# Altium PCB MAGI'sBatteryPowerMega.PcbDoc (part 2 of 2)
Units mil, origin at the board's own origin, x right, y up, seen from the top; angles counter-clockwise.
Board outline 6000 x 4000 mil, 2 copper layers (Top Layer, Bottom Layer); 34 components, 41 nets, 189 pads, 153 vias.
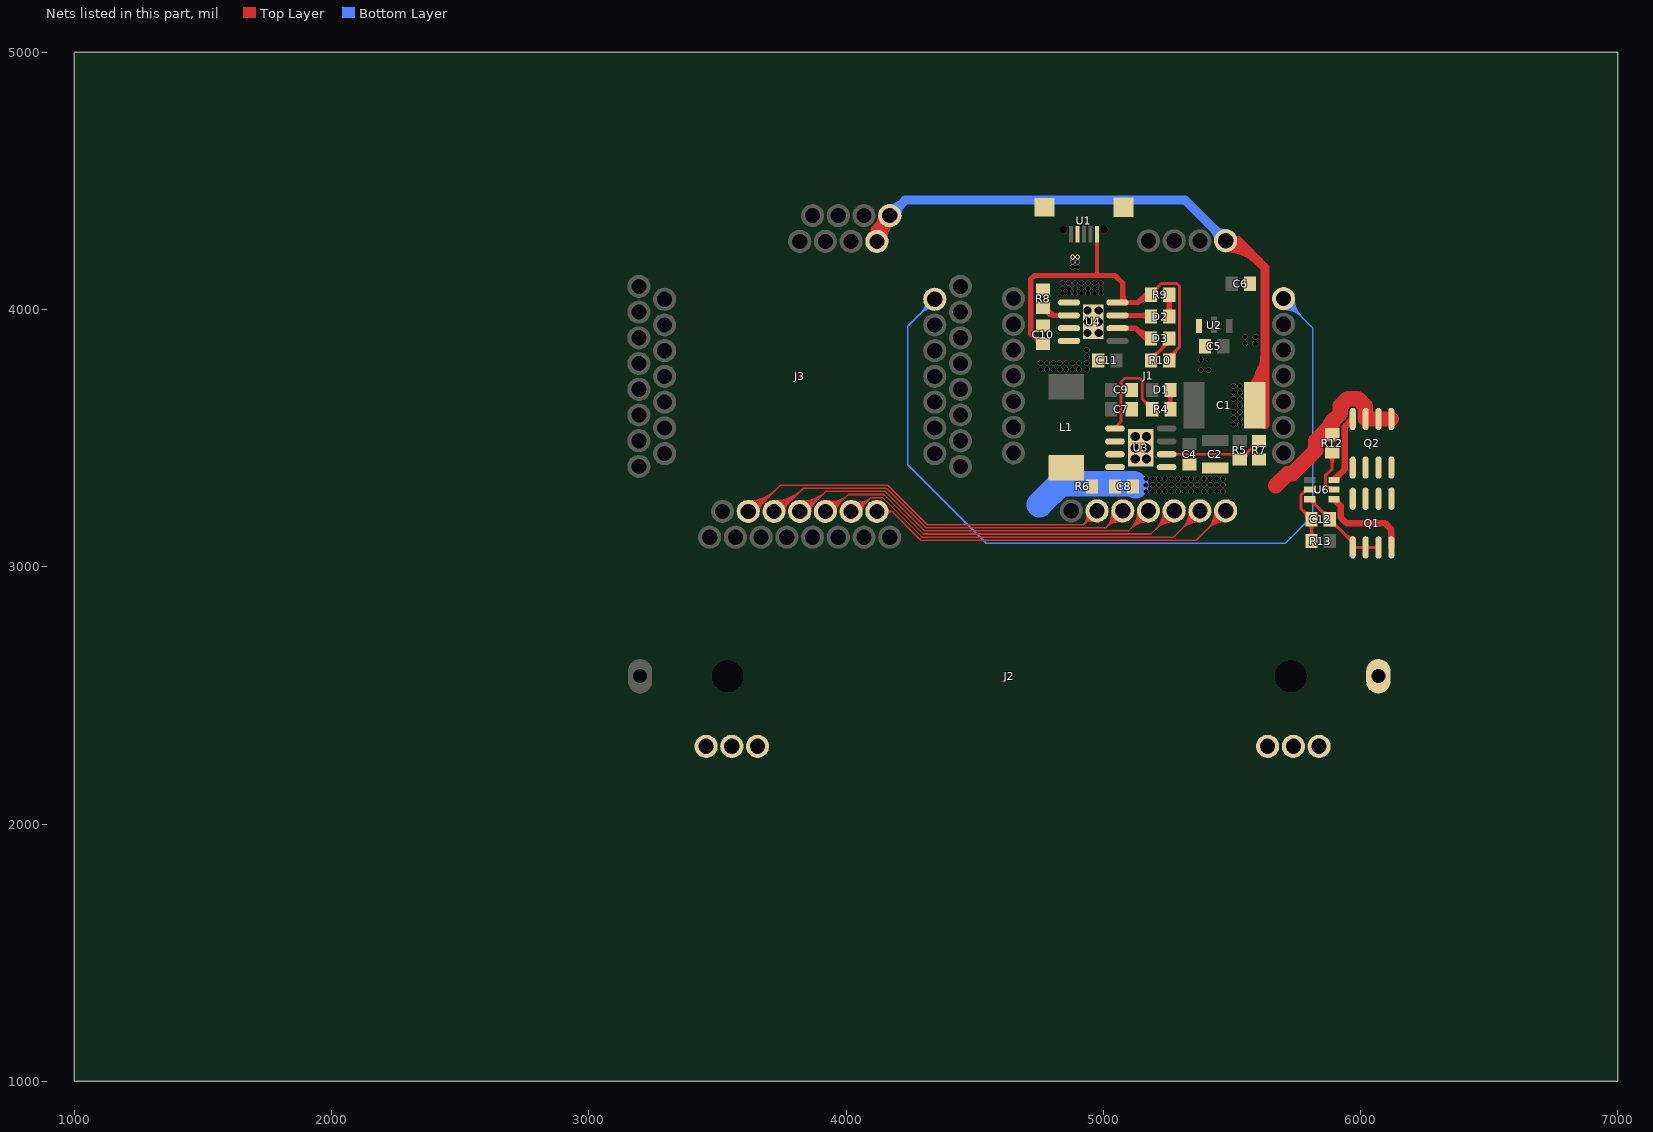
[diagram p2: the nets of this part, all layers, seen from the top]

## Via types
v1: diameter 19.68, hole 19.68, Top Layer to Bottom Layer, 125 vias
v2: diameter 19.68, hole 11.81, Top Layer to Bottom Layer, 11 vias
v3: diameter 35.43, hole 31.5, Top Layer to Bottom Layer, 6 vias
v4: diameter 35.43, hole 35.43, Top Layer to Bottom Layer, 6 vias
v5: diameter 19.68, hole 15.75, Top Layer to Bottom Layer, 5 vias

## Nets (pads, with @x,y where several pads share a name; then routed paths per layer and width w, separated by ;. In a path a pad name is that pad's centre, name@x,y a point inside that pad or via, vN(x,y) a via of type N, cw(c..) or ccw(c..) an arc to the next point about the centre after c; other vN are vias at no path point) (continued)
D8: J1.16 J3.16 | length 2425.1
  Top Layer w6: J3.16@3620,3215 3643.63,3215 3745.63,3317 4162.25,3317 4315.81,3163.44 4921.94,3163.44 ; J3.16@3620,3221 ccw(c3620,3292.54) 3670.59,3241.95 ; J3.16@3620,3227 ccw(c3620,3313.02) 3680.83,3252.2 ; J3.16@3620,3233 ccw(c3620,3333.51) 3691.07,3262.44 ; J3.16@3620,3239 ccw(c3620,3353.99) 3701.31,3272.68 ; J3.16@3620,3245 ccw(c3620,3374.48) 3711.56,3282.92 ; J3.16@3620,3251 ccw(c3620,3394.97) 3721.8,3293.17 ; J3.16@3620,3257 ccw(c3620,3415.45) 3732.04,3303.41 ; J3.16@3656,3215 cw(c3685.86,3215) 3664.75,3236.11 ; J3.16@3662,3215 cw(c3706.34,3215) 3674.99,3246.36 ; J1.16@4934.96,3208.26 cw(c4887.71,3197.68) 4921.95,3163.44 ; 4937.37,3178.87 cw(c4961.83,3154.41) J1.16@4969.39,3188.17 ; 4937.38,3178.87 ccw(c4912.92,3203.33) J1.16@4946.67,3210.89 ; J1.16@4940.81,3209.58 cw(c4900.31,3200.51) 4929.66,3171.16 cw(c4959.01,3141.81) J1.16@4968.08,3182.31 ; J1.16@4966.77,3176.46 ccw(c4956.19,3129.2) 4921.95,3163.44 ; J1.16@4975.94,3217.44 4921.94,3163.44
D9: J1.17 J3.17 | length 2614.3
  Top Layer w6: J3.17@3720,3215 3743.63,3215 3833.63,3305 4157.28,3305 4310.84,3151.44 5009.94,3151.44 ; J3.17@3720,3221 ccw(c3720,3292.54) 3770.59,3241.95 ; J3.17@3720,3227 ccw(c3720,3313.02) 3780.83,3252.2 ; J3.17@3720,3233 ccw(c3720,3333.51) 3791.07,3262.44 ; J3.17@3720,3239 ccw(c3720,3353.99) 3801.31,3272.68 ; J3.17@3720,3245 ccw(c3720,3374.48) 3811.56,3282.92 ; J3.17@3720,3251 ccw(c3720,3394.97) 3821.8,3293.17 ; J3.17@3720,3257 ccw(c3720,3415.45) 3832.04,3303.41 ; J3.17@3756,3215 cw(c3785.86,3215) 3764.75,3236.11 ; J3.17@3762,3215 cw(c3806.34,3215) 3774.99,3246.36 ; J1.17@5034.02,3214.91 cw(c4951.47,3209.93) 5009.95,3151.44 ; J1.17@5040.01,3215.27 cw(c4969.25,3211) 5019.38,3160.87 cw(c5069.5,3110.74) J1.17@5073.78,3181.51 ; J1.17@5046,3215.63 cw(c4987.03,3212.07) 5028.8,3170.3 cw(c5070.58,3128.53) J1.17@5074.14,3187.5 ; J1.17@5051.99,3215.99 cw(c5004.81,3213.15) 5038.23,3179.73 cw(c5071.65,3146.31) J1.17@5074.5,3193.48 ; J1.17@5073.41,3175.52 ccw(c5068.43,3092.96) 5009.95,3151.44 ; J1.17@5075.94,3217.44 5009.94,3151.44
D10: J1.18 J3.18 | length 2598.4
  Top Layer w6: J3.18@3820,3215 3843.63,3215 3921.63,3293 ; J3.18@3820.48,3220.98 ccw(c3825.19,3279.29) 3866.56,3237.92 ; J3.18@3820.97,3226.96 ccw(c3826.56,3296.28) 3875.74,3247.1 ; J3.18@3821.45,3232.94 ccw(c3827.94,3313.26) 3884.91,3256.28 ; J3.18@3821.93,3238.92 ccw(c3829.31,3330.25) 3894.09,3265.46 ; J3.18@3822.41,3244.9 ccw(c3830.68,3347.23) 3903.27,3274.64 ; J3.18@3822.9,3250.88 ccw(c3832.05,3364.22) 3912.45,3283.82 ; J3.18@3823.38,3256.86 ccw(c3833.42,3381.2) 3921.63,3292.99 ; J3.18@3856,3215 cw(c3885.86,3215) 3864.75,3236.11 ; J3.18@3862,3215 cw(c3906.34,3215) 3874.99,3246.36 ; J1.18@5133.94,3217.44 cw(c5032.55,3217.44) 5104.25,3145.74 cw(c5175.94,3074.04) J1.18@5175.94,3175.44 ; J1.18@5139.94,3217.44 cw(c5053.03,3217.44) 5114.49,3155.99 cw(c5175.94,3094.53) J1.18@5175.94,3181.44 ; J1.18@5145.94,3217.44 cw(c5073.52,3217.44) 5124.73,3166.23 cw(c5175.94,3115.01) J1.18@5175.94,3187.44 ; J1.18@5151.94,3217.44 cw(c5094,3217.44) 5134.97,3176.47 cw(c5175.94,3135.5) J1.18@5175.94,3193.44 ; J1.18@5175.94,3217.44 5097.94,3139.44 4305.87,3139.44 4152.31,3293 3921.63,3293
D11: J1.19 J3.19 | length 2508.7
  Top Layer w6: J3.19@3920,3215 3943.63,3215 4009.63,3281 ; J3.19@3921.16,3220.89 ccw(c3929.92,3265.28) 3961.92,3233.28 ; J3.19@3922.32,3226.77 ccw(c3932.54,3278.56) 3969.87,3241.24 ; J3.19@3923.48,3232.66 ccw(c3935.16,3291.84) 3977.82,3249.19 ; J3.19@3924.65,3238.55 ccw(c3937.78,3305.13) 3985.77,3257.14 ; J3.19@3925.81,3244.43 ccw(c3940.4,3318.41) 3993.72,3265.09 ; J3.19@3926.97,3250.32 ccw(c3943.03,3331.69) 4001.68,3273.04 ; J3.19@3928.13,3256.21 ccw(c3945.65,3344.98) 4009.63,3281 ; J3.19@3956,3215 cw(c3985.86,3215) 3964.75,3236.11 ; J3.19@3962,3215 cw(c4006.34,3215) 3974.99,3246.36 ; J1.19@5233.94,3217.44 cw(c5132.55,3217.44) 5204.25,3145.74 cw(c5275.94,3074.04) J1.19@5275.94,3175.44 ; J1.19@5239.94,3217.44 cw(c5153.03,3217.44) 5214.49,3155.99 cw(c5275.94,3094.53) J1.19@5275.94,3181.44 ; J1.19@5245.94,3217.44 cw(c5173.52,3217.44) 5224.73,3166.23 cw(c5275.94,3115.01) J1.19@5275.94,3187.44 ; J1.19@5251.94,3217.44 cw(c5194,3217.44) 5234.97,3176.47 cw(c5275.94,3135.5) J1.19@5275.94,3193.44 ; J1.19@5275.94,3217.44 5185.94,3127.44 4300.9,3127.44 4147.34,3281 4009.63,3281
D12: J1.20 J3.20 | length 2379.2
  Top Layer w6: J3.20@4020,3215 4043.63,3215 4097.63,3269 ; J3.20@4024,3226.31 ccw(c4036.82,3262.54) 4064,3235.37 ; J3.20@4026,3231.97 ccw(c4040.34,3272.48) 4070.73,3242.09 ; J3.20@4028.01,3237.63 ccw(c4043.86,3282.42) 4077.45,3248.82 ; J3.20@4030.01,3243.28 ccw(c4047.37,3292.35) 4084.18,3255.55 ; J3.20@4032.01,3248.94 ccw(c4050.89,3302.29) 4090.9,3262.27 ; J3.20@4034.01,3254.59 ccw(c4054.4,3312.22) 4097.63,3269 ; J3.20@4056,3215 cw(c4085.86,3215) 4064.75,3236.11 ; J3.20@4062,3215 cw(c4106.34,3215) 4074.99,3246.36 ; J1.20@5333.94,3217.44 cw(c5232.55,3217.44) 5304.25,3145.74 cw(c5375.94,3074.04) J1.20@5375.94,3175.44 ; J1.20@5339.94,3217.44 cw(c5253.03,3217.44) 5314.49,3155.99 cw(c5375.94,3094.53) J1.20@5375.94,3181.44 ; J1.20@5345.94,3217.44 cw(c5273.52,3217.44) 5324.73,3166.23 cw(c5375.94,3115.01) J1.20@5375.94,3187.44 ; J1.20@5351.94,3217.44 cw(c5294,3217.44) 5334.97,3176.47 cw(c5375.94,3135.5) J1.20@5375.94,3193.44 ; J1.20@5375.94,3217.44 5273.94,3115.44 4295.93,3115.44 4142.37,3269 4097.63,3269
D13: J1.21 J3.21 | length 2046
  Top Layer w6: J3.21@4120,3215 4179.4,3215 ; J3.21@4153.94,3203 cw(c4170.91,3197) 4170.91,3215 cw(c4170.91,3233) J3.21@4153.94,3227 ; J3.21@4159.6,3201 cw(c4179.39,3194) 4179.39,3215 ; J3.21@4159.6,3229 ccw(c4179.39,3236) 4179.39,3215 ; J1.21@5433.94,3217.44 cw(c5332.55,3217.44) 5404.25,3145.74 cw(c5475.94,3074.04) J1.21@5475.94,3175.44 ; J1.21@5439.94,3217.44 cw(c5353.03,3217.44) 5414.49,3155.99 cw(c5475.94,3094.53) J1.21@5475.94,3181.44 ; J1.21@5445.94,3217.44 cw(c5373.52,3217.44) 5424.73,3166.23 cw(c5475.94,3115.01) J1.21@5475.94,3187.44 ; J1.21@5451.94,3217.44 cw(c5394,3217.44) 5434.97,3176.47 cw(c5475.94,3135.5) J1.21@5475.94,3193.44 ; J1.21@5475.94,3217.44 5361.94,3103.44 4290.96,3103.44 4179.4,3215
GND: C1.2 C2.2 C4.2 C5.2 C6.2 C7.2 C8.2 C9.2 C10.2 C11.2 J1.1 J3.1 pad.1 pad.2 pad.3 pad.4 Q2.1 Q2.2 Q2.3 R7.2 R8.1 R12.1 U1.4 U1.6 U1.7 U2.1 U3.5 U3.9 U4.1 U4.3 U4.9 | length 5039
  Top Layer w35: J1.1@5475.94,4239.94 cw(c5475.94,4057.59) 5604.89,4186.53 ; J1.1@5475.94,4267.44 5523.98,4267.44 ; J1.1@5475.94,4274.94 cw(c5475.94,4177.09) 5545.14,4246.28 ; C1.2@5610.86,3686.29 cw(c5693.57,3722.86) 5615.25,3768.08 ; C1.2@5628.44,3552.44 5628.44,4162.97 5523.98,4267.44 ; 5523.98,4267.44 ccw(c5523.98,4239.25) 5499.66,4253.52 cw(c5523.98,4239.25) 5523.98,4267.44 ; 5523.98,4267.44 cw(c5523.98,4295.64) 5499.66,4281.36 ccw(c5523.98,4295.64) 5523.98,4267.44 ; C1.2@5572.2,3693.51 ccw(c5436.41,3829.3) 5628.44,3829.3 cw(c5436.41,3829.3) C1.2@5572.2,3693.51 ; C1.2@5596.95,3668.76 ccw(c5520.91,3744.8) 5628.44,3744.8 cw(c5520.91,3744.8) C1.2@5596.95,3668.76 ; C1.2@5621.7,3644.01 ccw(c5605.4,3660.31) 5628.44,3660.31 cw(c5605.4,3660.31) C1.2@5621.7,3644.01
  Top Layer w50: J3.1@4120,4265 4120,4307.52 J3.1@4170,4357.52 ; 4130.57,4318.09 ccw(c4083.66,4365) J3.1@4150,4365 ; J3.1@4139.81,4267.73 cw(c4245.27,4282.25) J3.1@4170,4357.52 ; 4144.58,4313.5 ccw(c4091.71,4344.02) J3.1@4150.68,4359.82 ; J3.1@4170,4365 J3.1@4170,4357.52
  Top Layer w60: 5670,3315 5716.44,3361.44 5734.5,3361.44 5826.44,3453.39 5826.44,3483.1 ; 5837.85,3501.84 cw(c5886.06,3453.63) 5886.06,3521.81 ccw(c5886.06,3471.33) 5850.36,3507.02 ; R12.1@5884.47,3512.25 cw(c5914.48,3529.51) 5890,3553.99 ; R12.1@5889.31,3511.04 cw(c5916.71,3537.05) 5890,3563.77 ; R12.1@5890,3515.43 5858.77,3515.43 5826.44,3483.1 ; Q2.1@6120,3574.49 Q2.2@6070,3574.49 Q2.3@6020,3574.49 6017.81,3576.68 6017.81,3625.79 5989.8,3653.8 5950.2,3653.8 5922.19,3625.79 5922.19,3595.96 5890,3563.77 ; 5826.44,3483.1 5826.44,3490.43 5890,3553.99 ; 5890,3553.99 5890,3563.77
  Bottom Layer w35: J3.1@4170,4365 4230,4425 5318.39,4425 J1.1@5475.94,4267.44 ; J3.1@4170,4392.5 ccw(c4170,4458.89) 4216.95,4411.95 ccw(c4263.89,4365) J3.1@4197.5,4365 ; J1.1@5448.44,4267.44 ccw(c5382.05,4267.44) 5429,4314.39 ccw(c5475.94,4361.33) J1.1@5475.94,4294.94
  Bottom Layer w100: 4752.45,3242.44 4832.45,3322.44 5119.44,3322.44 5125.94,3315.93
  other v1: 5165.94,3292.44 5190.94,3292.44 5215.94,3292.44 5240.94,3292.44 5265.94,3292.44 5290.94,3292.44 5315.94,3292.44 5340.94,3292.44 5365.94,3292.44 5390.94,3292.44 5415.94,3292.44 5440.94,3292.44 5465.94,3292.44 5165.94,3317.44 5190.94,3317.44 5215.94,3317.44 5240.94,3317.44 5265.94,3317.44 5290.94,3317.44 5315.94,3317.44 5340.94,3317.44 5365.94,3317.44 5390.94,3317.44 5415.94,3317.44 5440.94,3317.44 5465.94,3317.44 5165.94,3342.44 5190.94,3342.44 5215.94,3342.44 5240.94,3342.44 5265.94,3342.44 5290.94,3342.44 5315.94,3342.44 5340.94,3342.44 5365.94,3342.44 5390.94,3342.44 5415.94,3342.44 5440.94,3342.44 5465.94,3342.44 5505.94,3552.44 5530.94,3552.44 5505.94,3577.44 5530.94,3577.44 5505.94,3602.44 5530.94,3602.44 5505.94,3627.44 5530.94,3627.44 5505.94,3652.44 5530.94,3652.44 5505.94,3677.44 5530.94,3677.44 5505.94,3702.44 5530.94,3702.44 5380,3765 5410,3765 4755.94,3767.44 4780.94,3767.44 4805.94,3767.44 4830.94,3767.44 4855.94,3767.44 4880.94,3767.44 4905.94,3767.44 4935.94,3767.44 4755.94,3792.44 4780.94,3792.44 4805.94,3792.44 4830.94,3792.44 4855.94,3792.44 4880.94,3792.44 4905.94,3792.44 4935.94,3792.44 5380,3805 5410,3805 4935.94,3817.44 4935.94,3842.44 5550.94,3867.44 5590.94,3867.44 5550.94,3892.44 5590.94,3892.44 4840.94,4062.44 4865.94,4062.44 4890.94,4062.44 4915.94,4062.44 4940.94,4062.44 4965.94,4062.44 4990.94,4062.44 4840.94,4082.44 4865.94,4082.44 4890.94,4082.44 4915.94,4082.44 4940.94,4082.44 4965.94,4082.44 4990.94,4082.44 4840.94,4102.44 4865.94,4102.44 4890.94,4102.44 4915.94,4102.44 4940.94,4102.44 4965.94,4102.44 4990.94,4102.44 4880,4165 4900,4165
  other v2: 4880,4205 4900,4205
  other v3: 4939.29,3909.13 4982.6,3909.13 4939.29,3952.44 4982.6,3952.44 4939.29,3995.75 4982.6,3995.75
  other v4: 5124.29,3419.13 5167.6,3419.13 5124.29,3462.44 5167.6,3462.44 5124.29,3505.75 5167.6,3505.75
  other v5: 4880,4185 4900,4185
NetC3_2: R5.2 R7.1 U3.6 | length 843
  Top Layer w10: U3.6@5246.34,3437.44 5510.51,3437.44 R5.2@5530.94,3417.01 5532.47,3417.01 5603.34,3487.87 R7.1@5605.94,3487.87 ; R5.2@5533.52,3417.22 cw(c5562.45,3412.71) 5554.87,3440.99 ; R5.2@5535.22,3415.67 ccw(c5527.02,3448.36) 5559.57,3439.63 ; 5289.36,3437.44 cw(c5289.36,3453.88) 5277.73,3442.26 ccw(c5289.36,3453.88) 5289.36,3437.44 ; 5289.36,3437.44 ccw(c5289.36,3421) 5277.73,3432.62 cw(c5289.36,3421) 5289.36,3437.44 ; R5.2@5534.88,3435.63 ccw(c5534.88,3474.77) 5562.56,3447.09 cw(c5534.88,3474.77) R5.2@5534.88,3435.63 ; R5.2@5543.5,3417.01 cw(c5570.13,3417.01) 5551.3,3435.84 ccw(c5570.13,3417.01) R5.2@5543.5,3417.01 ; R5.2@5553.5,3417.01 cw(c5604.28,3417.01) 5568.37,3452.91 ccw(c5604.28,3417.01) R5.2@5553.5,3417.01 ; 5569.28,3453.81 ccw(c5535.21,3487.87) 5583.39,3487.87 cw(c5535.21,3487.87) 5569.28,3453.81 ; 5572.49,3457.03 cw(c5602.01,3427.51) 5602.01,3469.25 ccw(c5602.01,3427.51) 5572.49,3457.03
NetC8_1: C8.1 R6.2 U3.3 U3.4
NetC12_1: C12.1 R13.1 U6.5 | length 455.9
  Top Layer w12: 5772.76,3221.8 ccw(c5809.57,3258.61) C12.1@5809.57,3206.56 ; 5777.55,3287.82 cw(c5792.91,3272.46) U6.5@5792.91,3294.19 ; 5782.27,3212.3 cw(c5758.91,3188.94) C12.1@5791.94,3188.94 ; R13.1@5797.11,3116.4 ccw(c5767.02,3146.48) 5809.57,3146.48 ccw(c5852.11,3146.48) R13.1@5822.03,3116.4 ; C12.1@5797.11,3168.6 cw(c5767.02,3138.52) 5809.57,3138.52 cw(c5852.11,3138.52) C12.1@5822.03,3168.6 ; U6.5@5802.76,3300 5789.72,3300 5769.1,3279.38 5769.1,3225.46 C12.1@5809.57,3185 R13.1@5809.57,3100
NetD1_2: D1.2 R4.1 | length 696.3
  Top Layer w10: R4.1@5261.38,3612.44 D1.2@5261.38,3687.44 ; R4.1@5261.38,3638.55 cw(c5306.34,3638.55) 5274.55,3670.34 ccw(c5306.34,3638.55) R4.1@5261.38,3638.55 ; R4.1@5261.38,3638.55 ccw(c5216.42,3638.55) 5248.21,3670.34 cw(c5216.42,3638.55) R4.1@5261.38,3638.55 ; D1.2@5261.38,3661.34 cw(c5216.42,3661.34) 5248.21,3629.55 ccw(c5216.42,3661.34) D1.2@5261.38,3661.34 ; D1.2@5261.38,3661.34 ccw(c5306.34,3661.34) 5274.55,3629.55 cw(c5306.34,3661.34) D1.2@5261.38,3661.34 ; R4.1@5250.71,3631.64 ccw(c5240.21,3646.68) 5257.93,3651.43 cw(c5240.21,3646.68) R4.1@5250.71,3631.64 ; D1.2@5250.71,3668.24 cw(c5240.21,3653.2) 5257.93,3648.46 ccw(c5240.21,3653.2) D1.2@5250.71,3668.24 ; R4.1@5252.07,3632.51 ccw(c5239.38,3654.47) 5263.89,3647.91 cw(c5239.38,3654.47) R4.1@5252.07,3632.51 ; D1.2@5252.07,3667.38 cw(c5239.38,3645.41) 5263.89,3651.97 ccw(c5239.38,3645.41) D1.2@5252.07,3667.38 ; 5258.87,3647.91 ccw(c5283.37,3654.47) 5270.69,3632.51 cw(c5283.37,3654.47) 5258.87,3647.91 ; 5258.87,3651.97 cw(c5283.37,3645.41) 5270.69,3667.38 ccw(c5283.37,3645.41) 5258.87,3651.97 ; 5264.83,3648.46 cw(c5282.54,3653.2) 5272.04,3668.24 ccw(c5282.54,3653.2) 5264.83,3648.46 ; 5264.83,3651.42 ccw(c5282.54,3646.68) 5272.04,3631.64 cw(c5282.54,3646.68) 5264.83,3651.42
NetD2_1: D2.1 R9.1 | length 291.6
  Top Layer w20: D2.1@5256.38,3972.44 R9.1@5256.38,4057.44 ; 5256.38,4009.26 cw(c5223.49,4009.26) 5246.75,3986.01 ccw(c5223.49,4009.26) 5256.38,4009.26 ; 5256.38,4009.26 ccw(c5289.26,4009.26) 5266.01,3986.01 cw(c5289.26,4009.26) 5256.38,4009.26 ; 5256.38,4020.62 cw(c5289.26,4020.62) 5266.01,4043.87 ccw(c5289.26,4020.62) 5256.38,4020.62 ; 5256.38,4020.62 ccw(c5223.49,4020.62) 5246.75,4043.87 cw(c5223.49,4020.62) 5256.38,4020.62
NetD2_2: D2.2 U4.7 | length 235.5
  Top Layer w20: U4.7@5055.43,3977.44 5180.51,3977.44 D2.2@5185.51,3972.44 ; 5150.06,3977.44 cw(c5150.06,3940.92) 5175.88,3966.75 ccw(c5150.06,3940.92) 5150.06,3977.44 ; 5155.19,3977.44 ccw(c5155.19,4006.7) 5175.88,3986.01 cw(c5155.19,4006.7) 5155.19,3977.44
NetD3_1: D3.1 R10.1 | length 430.5
  Top Layer w12: R10.1@5185.51,3802.44 5185.51,3805.38 5256.38,3876.25 D3.1@5256.38,3887.44 ; R10.1@5185.51,3824 ccw(c5185.51,3868.94) 5217.29,3837.16 cw(c5185.51,3868.94) R10.1@5185.51,3824 ; R10.1@5203.13,3806.38 cw(c5243.28,3806.38) 5214.89,3834.76 ccw(c5243.28,3806.38) R10.1@5203.13,3806.38 ; 5221.17,3841.04 ccw(c5178.7,3883.5) 5238.76,3883.5 cw(c5178.7,3883.5) 5221.17,3841.04 ; 5238.68,3858.55 cw(c5256.38,3840.85) 5256.38,3865.88 ccw(c5256.38,3840.85) 5238.68,3858.55 ; D3.1@5241.65,3861.52 ccw(c5219.67,3883.5) 5250.76,3883.5 cw(c5219.67,3883.5) D3.1@5241.65,3861.52
NetD3_2: D3.2 U4.6 | length 338.7
  Top Layer w20: U4.6@5055.43,3927.44 5125.94,3927.44 ; D3.2@5185.51,3887.44 5165.94,3887.44 5125.94,3927.44 ; 5125.95,3927.44 ccw(c5180.46,3981.95) 5184.75,3904.98 cw(c5180.46,3981.95) 5125.95,3927.44 ; 5157.57,3895.82 ccw(c5183.8,3922.05) 5185.87,3885.01 cw(c5183.8,3922.05) 5157.57,3895.82
NetL1_1: L1.1 R4.2 U3.1 U3.2 | length 598.2
  Top Layer w10: U3.1@5045.55,3537.44 5045.55,3540.83 5069.13,3564.42 5069.13,3718.02 5083.55,3732.44 5142.16,3732.44 5151.89,3722.71 5151.89,3651.06 R4.2@5190.51,3612.44 ; 5152,3650.95 ccw(c5190.51,3689.46) 5190.51,3635 cw(c5190.51,3689.46) 5152,3650.95 ; 5161.51,3641.45 cw(c5136.44,3616.38) 5171.89,3616.38 ccw(c5136.44,3616.38) 5161.51,3641.45 ; R4.2@5169.07,3633.88 ccw(c5190.51,3655.32) 5190.51,3625 cw(c5190.51,3655.32) R4.2@5169.07,3633.88
NetQ1_4: Q1.4 U6.1 | length 384.6
  Top Layer w25: U6.1@5897.24,3262.6 5922.56,3237.29 5922.56,3192.44 5945,3170 6095,3170 6120,3145 Q1.4@6120,3075.51 ; U6.1@5906.4,3262.6 ccw(c5928.5,3262.6) 5912.87,3246.97
NetQ1_5: Q1.5 Q1.6 Q1.7 Q1.8 Q2.5 Q2.6 Q2.7 Q2.8
NetQ2_4: Q2.4 U6.3 | length 284.3
  Top Layer w25: U6.3@5897.24,3337.4 5938.5,3378.66 5938.5,3543.68 Q2.4@5969.31,3574.49 ; U6.3@5906.4,3337.4 cw(c5928.5,3337.4) 5912.87,3353.03
NetR8_2: R8.2 U4.2 | length 346
  Top Layer w20: R8.2@4765.94,4007.01 4791.46,3981.5 ; U4.2@4866.46,3977.44 4805.84,3977.44 4801.79,3981.5 ; R8.2@4769.88,3993.39 cw(c4769.88,3970) 4786.42,3986.54 ccw(c4769.88,3970) R8.2@4769.88,3993.39 ; R8.2@4769.88,3993.39 cw(c4769.88,3945.06) 4804.05,3979.23 ccw(c4769.88,3945.06) R8.2@4769.88,3993.39 ; 4791.46,3981.5 cw(c4811.51,4001.55) 4783.39,4005.24 ccw(c4811.51,4001.55) 4791.46,3981.5 ; 4791.46,3981.5 4801.79,3981.5 ; 4801.79,3981.5 ccw(c4772.89,3952.6) 4770.63,3993.41 cw(c4772.89,3952.6) 4801.79,3981.5
NetR12_2: R12.2 U6.2 | length 261.3
  Top Layer w12: 5872.03,3312.18 ccw(c5887.4,3327.54) U6.2@5887.4,3305.81 ; R12.2@5877.54,3432.11 cw(c5847.46,3402.02) 5890,3402.02 cw(c5932.54,3402.02) R12.2@5902.46,3432.11 ; R12.2@5890,3444.57 5890,3380 5882.05,3372.05 5881.46,3372.05 5863.59,3354.18 5863.59,3320.62 5884.21,3300 U6.2@5897.24,3300
PGND: C12.2 J2.2 Q1.1 Q1.2 Q1.3 U6.6 | length 640.9
  Top Layer w12: U6.6@5802.76,3262.6 C12.2@5880.43,3185 C12.2@5880.43,3185 5970,3095.43 Q1.1@5970,3075.51 Q1.2@6020,3075.51 Q1.3@6070,3075.51 ; U6.6@5818.41,3262.6 ccw(c5856.2,3262.6) 5829.48,3235.88 ; 5843.49,3221.86 ccw(c5880.43,3258.8) C12.2@5880.43,3206.56 ; 5853.19,3212.16 cw(c5829.96,3188.94) C12.2@5862.81,3188.94 ; C12.2@5880.43,3163.44 cw(c5880.43,3111.39) 5917.24,3148.2 ; C12.2@5898.06,3181.06 ccw(c5931.09,3181.06) 5907.73,3157.7 ; 5940.32,3125.11 ccw(c5970,3154.79) Q1.1@5970,3112.82 ; Q1.1@5974.11,3071.4 cw(c5984.03,3061.48) 5984.03,3075.51 cw(c5984.03,3089.54) Q1.1@5974.11,3079.62 ; Q1.2@6015.89,3071.4 ccw(c6005.97,3061.48) 6005.97,3075.51 ccw(c6005.97,3089.54) Q1.2@6015.89,3079.62 ; Q1.2@6024.11,3071.4 cw(c6034.03,3061.48) 6034.03,3075.51 cw(c6034.03,3089.54) Q1.2@6024.11,3079.62 ; Q1.3@6065.89,3071.4 ccw(c6055.97,3061.48) 6055.97,3075.51 ccw(c6055.97,3089.54) Q1.3@6065.89,3079.62
RST: J1.28 J3.28 | length 4188.7
  Bottom Layer w6: J3.28@4312,4040 cw(c4232.33,4040) 4288.67,3983.67 cw(c4345,3927.33) J3.28@4345,4007 ; J3.28@4318,4040 cw(c4252.82,4040) 4298.91,3993.91 cw(c4345,3947.82) J3.28@4345,4013 ; J3.28@4324,4040 cw(c4273.3,4040) 4309.15,4004.15 cw(c4345,3968.3) J3.28@4345,4019 ; J3.28@4330,4040 cw(c4293.79,4040) 4319.39,4014.39 cw(c4345,3988.79) J3.28@4345,4025 ; J3.28@4345,4040 4240,3935 4240,3396.51 4545.07,3091.44 5708.26,3091.44 5814.94,3198.12 5814.94,3928.44 J1.28@5700.94,4042.44 ; J1.28@5700.94,4000.44 cw(c5700.94,3899.04) 5772.64,3970.74 cw(c5844.34,4042.44) J1.28@5742.94,4042.44 ; J1.28@5700.94,4006.44 cw(c5700.94,3919.53) 5762.4,3980.99 cw(c5823.86,4042.44) J1.28@5736.94,4042.44 ; J1.28@5700.94,4012.44 cw(c5700.94,3940.01) 5752.16,3991.23 cw(c5803.37,4042.44) J1.28@5730.94,4042.44 ; J1.28@5700.94,4018.44 cw(c5700.94,3960.5) 5741.92,4001.47 cw(c5782.89,4042.44) J1.28@5724.94,4042.44
VCC: C10.1 R9.2 R10.2 U1.1 U4.4 U4.8 | length 2123.5
  Top Layer w12: R9.2@5185.51,4057.44 5185.51,4060.38 5226.13,4101 5286.63,4101 5296,4091.63 5296,3853.25 5256.38,3813.63 R10.2@5256.38,3802.44 ; R9.2@5185.51,4079 ccw(c5185.51,4123.94) 5217.29,4092.16 cw(c5185.51,4123.94) R9.2@5185.51,4079 ; R9.2@5203.13,4061.38 cw(c5243.28,4061.38) 5214.89,4089.76 ccw(c5243.28,4061.38) R9.2@5203.13,4061.38 ; R10.2@5256.38,3824 ccw(c5256.38,3849.03) 5274.08,3831.33 cw(c5256.38,3849.03) R10.2@5256.38,3824 ; R10.2@5262,3806.38 cw(c5293.09,3806.38) 5271.1,3828.36 ccw(c5293.09,3806.38) R10.2@5262,3806.38 ; R10.2@5274,3806.38 cw(c5334.06,3806.38) 5291.59,3848.84 ccw(c5334.06,3806.38) R10.2@5274,3806.38
  Top Layer w15: U1.1@4976.18,4292.34 4976.18,4137.2 4980.94,4132.44
  Top Layer w20: C10.1@4765.94,3867.01 4757.35,3867.01 4718.39,3905.97 4718.39,4107.44 4718.39,4118.17 4732.66,4132.44 4980.94,4132.44 5045.94,4132.44 5075.94,4102.44 U4.8@5075.94,4027.44 ; U4.8@5055.43,4027.44 5135.51,4027.44 ; R9.2@5185.51,4057.44 5175.51,4067.44 5135.51,4027.44 ; 5135.51,4027.44 cw(c5170.16,3992.8) 5182.17,4040.3 ccw(c5170.16,3992.8) 5135.51,4027.44 ; 4730.79,3893.56 ccw(c4762.01,3924.77) 4762.01,3880.63 cw(c4762.01,3924.77) 4730.79,3893.56 ; C10.1@4742.05,3882.3 cw(c4726.76,3867.01) 4748.39,3867.01 ccw(c4726.76,3867.01) C10.1@4742.05,3882.3 ; 5075.94,4058.33 ccw(c5117.82,4058.33) 5088.21,4028.72 cw(c5117.82,4058.33) 5075.94,4058.33 ; 5160.41,4052.34 cw(c5180.21,4032.54) 5187.08,4059.69 ccw(c5180.21,4032.54) 5160.41,4052.34
pads on no net: J1.4 J2.0 J3.4 J3.29 J3.30 J3.31 J3.32 J3.33 J3.34 J3.35 J3.36 J3.37 J3.38 J3.39 J3.40 J3.41 J3.42 J3.43 J3.44 J3.45 J3.46 J3.47 J3.48 J3.49 J3.50 J3.51 J3.52 U1.0 U1.2 U1.3 U1.5 U6.4

## Polygon pours and split planes (outlines as drawn)
GND on Top Layer "Keep-Out Layer-No Net" (solid, pour order 7): 4654.55,3217.44 5700.94,3217.44 5700.94,4267.44 4650.94,4267.44
GND on Top Layer "Bottom Layer-No Net" (solid, pour order 5): 4651.09,4224.24 4650,4225.33 4650,4450 5140,4450 5140,4345 5140,4340 5100,4300 5100,4225
GND on Bottom Layer "Keep-Out Layer-No Net" (solid, pour order 8): 4650.94,4267.44 5700.94,4267.44 5700.94,3217.44 4650.94,3217.44
GND on Bottom Layer "Bottom Layer-No Net" (solid, pour order 6): 3070,4465 6170,4465 6170,2140 3070,2140

## Keep-outs
Keep-Out Layer:
  lines w10: 3070,2140 6170,2140 6170,4465 3070,4465 3070,2140

## Other copper
Top Layer:
  rectangle net GND: 5515.94,3802.44 5575.94,3902.44
  rectangle net GND: 5545.94,3677.44 5615.94,3962.44
  rectangle net 5V: 5340.94,3977.44 5465.94,4072.44
  rectangle net 5V: 5340.94,4052.44 5466.38,4122.44
  region net GND: 4905.94,4325 4870,4325 4870,4180 4905.94,4180
  rectangle net GND: 5540.94,3857.44 5600.94,3962.44
  rectangle net 5V: 5090.94,4142.44 5220.94,4202.44
  rectangle net GND: 4735.94,3742.44 5005.94,3817.44
  rectangle net BAT: 5062.2,3743.12 5065.94,3752.44
  rectangle net BAT: 5040.94,3732.44 5062.2,3752.44
  rectangle net BAT: 5020.94,3722.44 5050.94,3747.44
  rectangle net 3.3V: 5480.94,3912.44 5520.94,4032.44
  rectangle net GND: 5340.94,3818.75 5405.94,3962.44
  rectangle net BAT: 5020.94,3747.44 5130.94,3892.44
  rectangle net GND: 4920.94,3772.44 5000.94,3909.13
  rectangle net GND: 4810.94,4002.44 5000.94,4102.44
  rectangle net GND: 4740.94,4052.44 5025.94,4112.44
  rectangle net VCC: 4735.94,3832.44 4905.94,3892.44
  rectangle net GND: 4750,3900 4960.94,3955
  rectangle net NetL1_1: 4780.94,3462.44 5085.94,3552.44
  rectangle net NetL1_1: 4785.94,3367.44 4990.94,3552.44
  rectangle net BAT: 4710.94,3567.44 5050.94,3722.44
  rectangle net BAT: 4705.94,3282.44 4770.94,3722.44
  rectangle net BAT: 4690.94,3282.44 4910.94,3342.44
  rectangle net NetC8_1: 4930.94,3282.44 5065.94,3342.44
  rectangle net NetC8_1: 5005.94,3282.44 5065.94,3452.44
  rectangle net NetC8_1: 5015.94,3362.44 5085.94,3452.44
  rectangle net 5V: 5210.94,3472.44 5485.94,3562.44
  rectangle net 5V: 5310.94,3472.44 5485.94,3717.44
  rectangle net 5V: 5470.94,3472.44 5555.94,3512.44
  rectangle net GND: 5095.94,3282.44 5195.94,3557.44
  rectangle net GND: 5095.94,3282.44 5490.94,3412.44
  rectangle net GND: 5475.94,3282.44 5635.94,3382.44
  rectangle net GND: 5575.94,3342.44 5635.94,3397.44
  rectangle net GND: 5095.94,3557.44 5135.94,3712.44
  rectangle net GND: 5495.94,3537.44 5630.94,3717.44
  rectangle net GND: 5361.89,3810 5430,3899.02
  rectangle net GND: 5530,4040 5610,4145
  rectangle net GND: 5760,3420 5855,3765
  rectangle net GND: 5760,3630 6155,3765
  rectangle net GND: 5810,3585 5950,3660
  rectangle net GND: 5840,3555 5880,3595
  rectangle net GND: 5989.8,3485 6155,3653.8
  rectangle net NetQ1_5: 5960,3190 6155,3475
  rectangle net PGND: 5915,3025 6095,3140
  rectangle net PGND: 5915,2165 6095,3140
  rectangle net PGND: 5975,2165 6150,2985
  rectangle net BAT: 3090,2165 3370,2985
  rectangle net GND: 4859.95,4150 4900,4267.44
  rectangle net GND: 4870,4150 4925,4230
  text "MAGI" at 5929.65,4391.46 h39.37
  text "Battery" at 5880,4330 h40
  text "Power" at 5910,4270 h40
Bottom Layer:
  rectangle net GND: 5065.94,3272.44 5570.94,3522.44
  rectangle net GND: 5500.94,3522.44 5575.94,3752.44
  rectangle net GND: 5335.94,3787.44 5615.94,3957.44
  rectangle net GND: 4730.94,3717.44 5015.94,4245
  rectangle net 5V: 5055.94,3537.44 5485.94,3717.44
  rectangle net 5V: 5055.94,3537.44 5220.94,4202.44

## Silkscreen, mask and mechanical layers (free items; w line width, h text height)
Top Overlay:
  circle w13: c5608.87,4182.44 r7.07
  lines w10: 4570.94,3642.44 4570.94,3337.44 ccw(c4770.94,3337.44) 4770.94,3137.44 ; 4570.94,4147.44 cw(c4770.94,4147.44) 4770.94,4347.44 5580.94,4347.44 cw(c5580.94,4147.44) 5780.94,4147.44 ; 4830.94,3137.44 4910.94,3137.44 ; 5580.94,3137.44 ccw(c5580.94,3337.44) 5780.94,3337.44
Bottom Solder:
  rectangle: 4825.94,3852.44 5045.94,4052.44
  rectangle: 5005.94,3362.44 5290.94,3532.44

## Text inside footprints (layer, text, board x,y; h text height)
J2: Top Overlay "-" at 5969.8,2672.87 h196.85 r180; Top Overlay "+" at 3426.89,2665.39 h196.85 r180
J3: Bottom Overlay "AREF" at 3869.57,4169.84 h31.5; Bottom Overlay "5V" at 3949.57,4169.84 h31.5; Bottom Overlay "3V3" at 4059.57,4169.84 h31.5; Bottom Overlay "GND" at 4164.57,4169.84 h31.5; Bottom Overlay "PD2" at 4291.54,4075.51 h31.5; Bottom Overlay "PC12" at 4291.54,3975.12 h31.5; Bottom Overlay "PC11" at 4291.54,3872.76 h31.5; Bottom Overlay "PC10" at 4291.54,3772.36 h31.5; Bottom Overlay "PC9" at 4291.54,3673.94 h31.5; Bottom Overlay "PC8" at 4291.54,3573.54 h31.5; Bottom Overlay "PC7" at 4291.54,3473.15 h31.5; Bottom Overlay "PC6" at 4291.54,3372.76 h31.5; Bottom Overlay "PC13" at 4216.73,3274.33 h23.62; Bottom Overlay "PC3" at 4106.5,3270.39 h31.5; Bottom Overlay "PC2" at 4010.04,3270.39 h31.5; Bottom Overlay "PC1" at 3909.65,3270.39 h31.5; Bottom Overlay "PC0" at 3809.25,3270.39 h31.5; Bottom Overlay "PB13" at 3708.86,3272.36 h23.62; Bottom Overlay "PB7" at 3608.46,3270.39 h31.5; Bottom Overlay "PB6" at 3506.1,3270.39 h31.5; Bottom Overlay "PA5" at 4167.52,3321.57 h31.5; Bottom Overlay "PA6" at 4067.13,3321.57 h31.5; Bottom Overlay "PA7" at 3966.73,3321.57 h31.5; Bottom Overlay "PA4" at 3866.34,3321.57 h31.5; Bottom Overlay "PB10" at 3767.91,3319.61 h23.62; Bottom Overlay "PB11" at 3667.52,3319.61 h23.62; Bottom Overlay "PB12" at 3567.13,3319.61 h23.62; Bottom Overlay "PB5" at 3443.11,3382.6 h31.5; Bottom Overlay "PB4" at 3443.11,3482.99 h31.5; Bottom Overlay "PB3" at 3443.11,3583.39 h31.5; Bottom Overlay "PA15" at 3458.86,3679.84 h31.5; Bottom Overlay "PA14" at 3458.86,3780.24 h31.5; Bottom Overlay "PA13" at 3458.86,3880.63 h31.5; Bottom Overlay "PB2" at 3431.3,3981.02 h31.5; Bottom Overlay "BOOT0" at 3492.32,4081.42 h31.5; Bottom Overlay "PA10" at 3458.86,4030.24 h31.5; Bottom Overlay "PA9" at 3433.27,3933.78 h31.5; Bottom Overlay "PA8" at 3433.27,3831.42 h31.5; Bottom Overlay "PA3" at 3433.27,3731.02 h31.5; Bottom Overlay "PA2" at 3433.27,3630.63 h31.5; Bottom Overlay "PA1" at 3433.27,3532.2 h31.5; Bottom Overlay "PA0" at 3443.11,3431.81 h31.5; Bottom Overlay "PC4" at 4291.54,3421.97 h31.5; Bottom Overlay "PC5" at 4291.54,3522.36 h31.5; Bottom Overlay "PB0" at 4291.54,3622.76 h31.5; Bottom Overlay "PB1" at 4291.54,3723.15 h31.5; Bottom Overlay "PB9" at 4291.54,3823.54 h31.5; Bottom Overlay "PB8" at 4291.54,3923.94 h31.5; Bottom Overlay "NRST" at 4291.54,4024.33 h31.5